# Allegro board ESP8266_SWITCH.brd
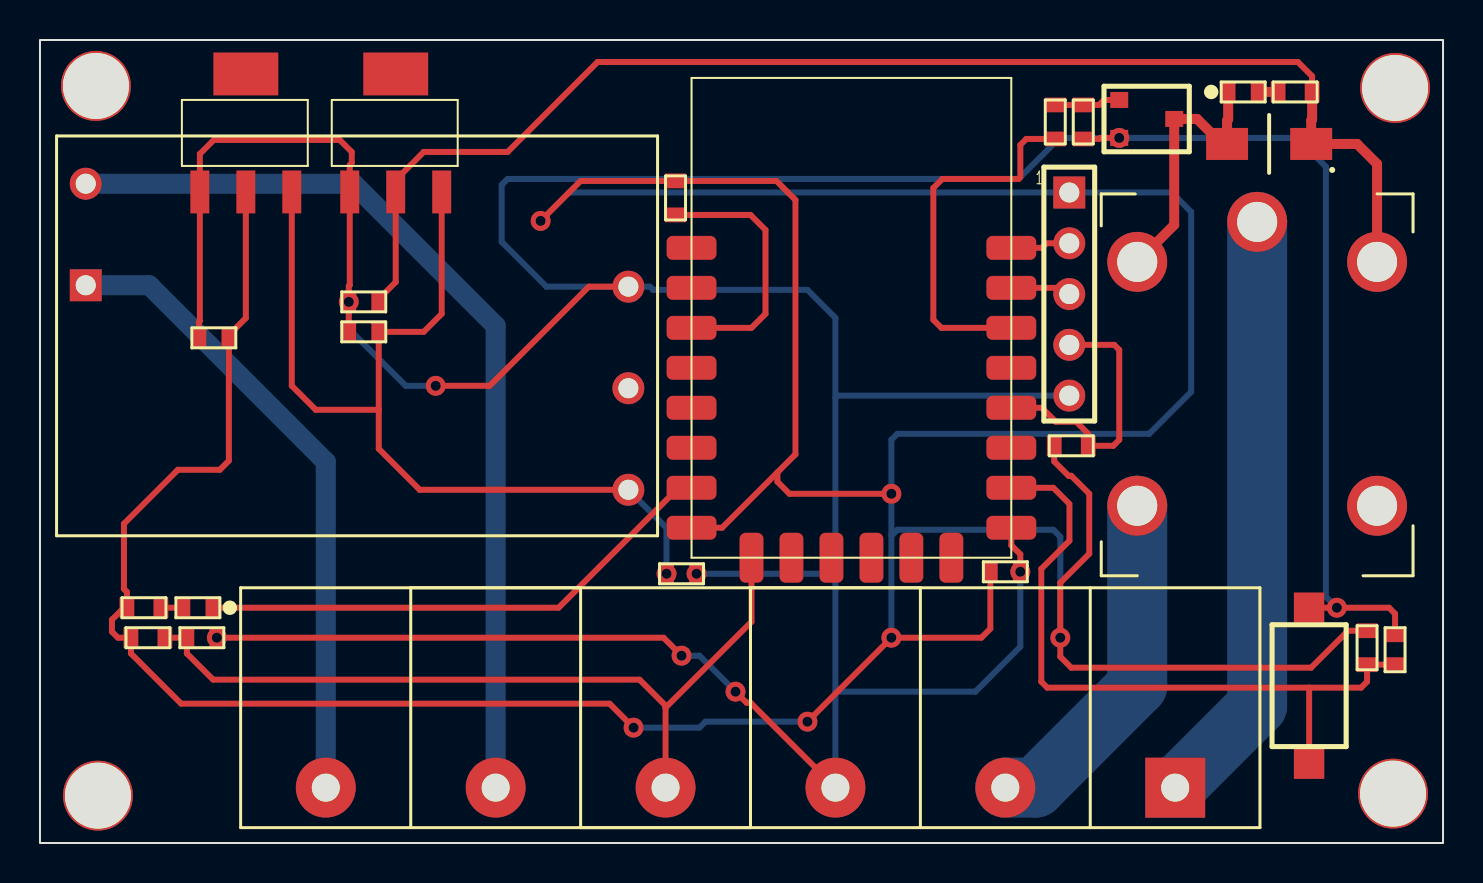
[diagram p0: board, top side]
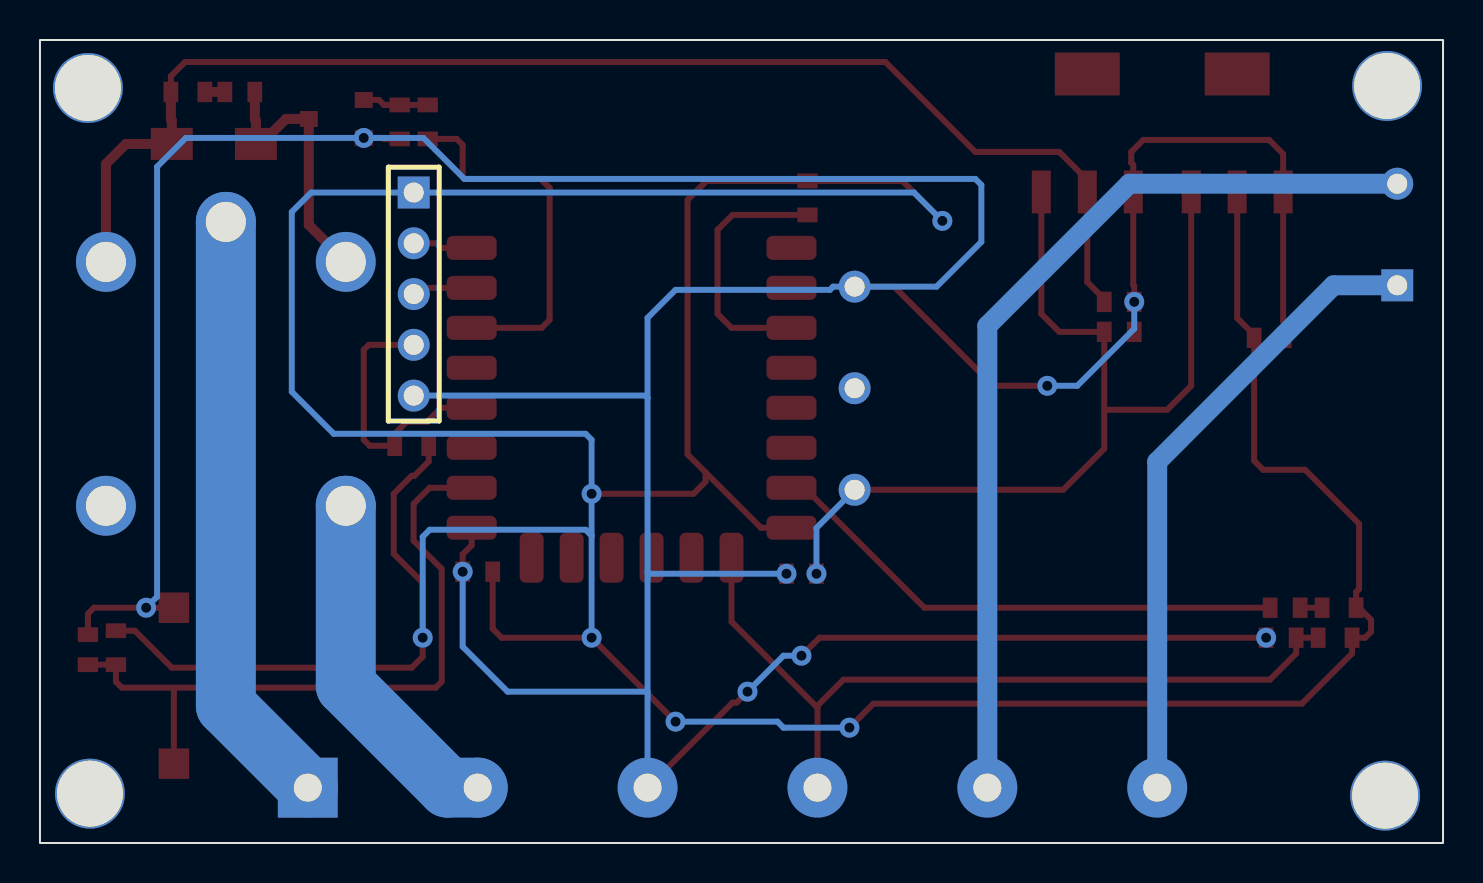
[diagram p1: board, bottom side, seen from below]

Outline 70.2 x 40.17 mm; copper layers: TOP, BOTTOM. Coordinates in mm from the lower left corner of the outline.
Outline path: rectangle 0,0 70.2,40.17

## Design rules (mm)
constraint set DEFAULT: min track width 0.3

## Placement (name value [footprint] x y rotation side)
C1  104  [CAP_SMD_0603]  16.2 25.57 180 top
C2  104  [CAP_SMD_0603]  32.1 13.47 0 top
C3  104  [CAP_SMD_0603]  8.7 25.27 180 top
C4  104  [CAP_SMD_0603]  16.2 27.07 180 top
C5  104  [CAP_SMD_0603]  67.8 9.67 90 top
C6  104  [CAP_SMD_0603]  48.3 13.57 180 top
C7  104  [CAP_SMD_0603]  8.1 10.27 0 top
D1  PWM LED  [LED_SMD_0603]  7.9 11.77 180 top
D2  1N4007  [1N4007_SMD]  61.5 34.97 180 top
D3  PWM LED  [LED_SMD_0603]  60.2 37.57 0 top
J3  CON5  [J1_5_254]  51.5 31.27 270 top
J4  CON6  [KF850_6P]  56.8 2.77 180 top
LS1  RELAY SPDT  [SONGLE_RELAY_5PINS]  60.9 22.97 0 top
M1  12V  [AC2DC_CONVERTER]  30.9 15.37 180 top
NOREF  -  [unnamed]  2.9 2.37 0 top
NOREF#2  -  [unnamed]  67.8 37.77 0 top
NOREF#3  -  [unnamed]  2.8 37.87 0 top
NOREF#4  -  [unnamed]  67.7 2.47 0 top
Q1  MMBT2222A  [SOT23]  54 37.17 90 top
R1  330R  [RES_SMD_0603]  5.2 11.77 0 top
R2  1K  [RES_SMD_0603]  62.8 37.57 180 top
R3  1K  [RES_SMD_0603]  50.8 36.07 270 top
R4  100k  [RES_SMD_0603]  52.2 36.07 270 top
R5  10K  [RES_SMD_0603]  66.4 9.77 90 top
R6  10K  [RES_SMD_0603]  31.8 32.27 270 top
R7  10K  [RES_SMD_0603]  51.6 19.87 180 top
R8  10K  [RES_SMD_0603]  5.4 10.27 180 top
SW1  SW_PB_SPST  [SMD_2PIN_BUTTON]  63.5 7.87 90 top
U1  AMS1117  [SOT223]  10.2 35.47 0 top
U2  AMS1117  [SOT223]  17.7 35.47 0 top
U3  ESP8266-12E  [ESP8266_SMD]  32.6 14.27 0 top

## Library data of the parts
C1-C7 = CAPACITOR NON-POL
D1 D3 = LED
D2 = DIODE_0
J3 = CON5
J4 = CON6
LS1 = RELAY SPDT
M1 = AC2DC_Module
Q1 = NPN BEC_1
R1-R8 = R
SW1 = SW_PB_SPST
U1 U2 = ASM1117
U3 = ESP8266-12E

## Footprints (pads in the part's own frame, mm; a bottom-side part is the same pattern mirrored in y, then rotated)
1N4007_SMD
  rect 2.1x1.6 smd: A(2.104,0) C(-2.104,0)
AC2DC_CONVERTER
  rect 1.6x1.6 hole 1: 1(28.61,-12.53)
  round 1.6 hole 1: 2(28.61,-17.61) 3(1.46,-2.3) 4(1.46,-7.38) 5(1.46,-12.46)
CAP_SMD_0603
  rect 0.74x1.02 smd: 1(-0.75,0) 2(0.75,0)
ESP8266_SMD
  rrect 2.5x1.2 smd: 1(0,15.5) 2(0,13.5) 3(0,11.5) 4(0,9.5) 5(0,7.5) 6(0,5.5) 7(0,3.5) 8(0,1.5) 15(16,1.5) 16(16,3.5) 17(16,5.5) 18(16,7.5) 19(16,9.5) 20(16,11.5) 21(16,13.5) 22(16,15.5)
  rrect 1.2x2.5 smd: 9(3,0) 10(5,0) 11(7,0) 12(9,0) 13(11,0) 14(13,0)
J1_5_254
  rect 1.6x1.6 hole 1: 1(-1.27,0)
  round 1.6 hole 1: 2(1.27,0) 3(3.81,0) 4(6.35,0) 5(8.89,0)
KF850_6P
  rect 3x3 hole 1.4: 1(0,0)
  round 3 hole 1.4: 2(8.5,0) 3(17,0) 4(25.5,0) 5(34,0) 6(42.5,0)
LED_SMD_0603
  rect 0.74x1.02 smd: 1(-0.75,0) 2(0.75,0)
RES_SMD_0603
  rect 0.74x1.02 smd: 1(-0.85,0) 2(0.85,0)
SMD_2PIN_BUTTON
  rect 1.524x1.524 smd: 1(-3.9,0) 2(3.9,0)
SONGLE_RELAY_5PINS
  round 3 hole 2: 1(-6,6.1) 2(6,6.1) 3(0,8.1) 4(-6,-6.1) 5(6,-6.1)
SOT23
  rect 0.8x0.9 smd: 1(0,0) 2(-1.9,0) 3(-0.95,-2.75)
SOT223
  rect 3.25x2.15 smd: (0.1,3)
  rect 0.95x2.15 smd: 1(-2.201,-2.901) 2(0.099,-2.901) 3(2.399,-2.901)
unnamed
  round 3.5 hole 3.3: (0,0)

## Nets
3V3: C3.1 C6.2 J3.1 R1.1 R5.2 R6.1 R7.2 R8.2 U1.2(VOUT) U3.8(VCC)
5V: C4.1 D2.C(K) LS1.2 R2.1 U2.2(VOUT)
12V: C1.1 C2.1 M1.3 U1.3 U2.3
GND: C1.2 C2.2 C3.2 C4.2 C5.2 C6.1 C7.2 J3.5 J4.3 M1.5 Q1.2(E) R4.2 SW1.2 U1.1 U2.1 U3.15
A2: D2.A D3.1(CATHODE) LS1.1 Q1.3
AC1: J4.6 M1.1
AC2: J4.5 M1.2(AC2)
BUTTON: C5.1 R5.1 SW1.1 U3.16
CT: C7.1 J4.4 R8.1 U3.9
FLASH: J3.4 R7.1 U3.18
PWM: R3.2 U3.20
RL1: J4.2 LS1.4(NO)
RL2: J4.1 LS1.3
RX: J3.3 U3.21
STATUS: D1.1(CATHODE) U3.7
TX: J3.2 U3.22
N348867: Q1.1 R3.1 R4.1
N351637: R6.2 U3.3
N3492541: D3.2 R2.2
N3493341: D1.2 R1.2

Pads without a net: LS1 5; M1 4; U3 1 2 4 5 6 10 11 12 13 14 17 19

## Via types
v1: diameter 1, hole 0.5, TOP to BOTTOM, 16 vias

## Routing (per net, layer and track width the routed paths; a pad name or vN(x,y) marks a point on that pad's centre or on a via; arc(x,y) is an arc through that point)
3V3: length 227.9
  TOP w0.3: 36.9,18.54 34.13,15.77 U3.8 ; 36.9,18.54 36.9,18.07 37.5,17.47 v1(42.6,17.47) ; 36.9,18.54 37.8,19.44 37.8,32.17 36.85,33.12 R6.1 27.05,33.12 v1(25.05,31.12) ; R7.2 50.75,19.08 51.46,18.37 51.6,18.37 52.5,17.47 52.5,14.47 51.05,13.02 v1(51.05,10.27) 51.05,9.32 51.6,8.77 63.6,8.77 65.45,10.62 R5.2 ; U1.2 10.3,26.26 9.45,25.41 C3.1 9.45,19.12 9,18.67 6.9,18.67 4.2,15.97 4.2,12.71 4.35,12.56 R1.1 4.2,11.77 3.6,11.17 3.6,10.57 3.9,10.27 R8.2 4.55,9.48 7.06,6.97 28.5,6.97 v1(29.7,5.77) ; v1(38.4,6.07) v1(42.6,10.27) 47.1,10.27 47.55,10.72 C6.2
  BOTTOM w0.3: 42.6,15.37 v1(42.6,10.27) ; 42.6,15.37 v1(42.6,17.47) 42.6,20.17 42.9,20.47 55.5,20.47 57.6,22.57 57.6,31.57 56.63,32.54 J3.1 26.47,32.54 v1(25.05,31.12) ; 42.6,15.37 42.9,15.67 50.7,15.67 51.05,15.32 v1(51.05,10.27) ; v1(29.7,5.77) 33,5.77 33.3,6.07 v1(38.4,6.07)
5V: length 67.1
  TOP w0.3: C4.1 16.95,27.21 17.8,28.06 U2.2 17.8,33.17 19.2,34.57 23.4,34.57 27.9,39.07 62.94,39.07 63.65,38.36 R2.1
  TOP w0.5: LS1.2 66.9,33.97 65.9,34.97 D2.C 63.6,36.15 63.65,36.19 R2.1
12V: length 48.3
  TOP w0.3: U2.3 20.1,26.47 19.2,25.57 C1.1 16.95,21.67 ; 16.95,21.67 13.8,21.67 12.6,22.87 U1.3 ; 16.95,21.67 16.95,19.72 19,17.67 M1.3
  BOTTOM w0.3: v1(31.35,13.47) 31.35,15.76 M1.3
GND: length 231.1
  TOP w0.3: v1(34.8,7.57) 35.35,7.02 35.55,7.02 J4.3 ; C1.2 v1(15.45,27.07) 15.45,27.86 15.5,27.91 U2.1 15.5,33.92 15.6,34.02 15.6,34.57 15,35.17 8.7,35.17 8,34.47 U1.1 8,26.11 7.95,26.06 C3.2 ; U3.15 48.6,14.89 49.05,14.44 v1(49.05,13.57) ; v1(54,35.27) 53.04,35.27 52.99,35.22 R4.2 ; C5.2 67.8,11.47 67.5,11.77 v1(64.89,11.77) SW1.2 ; v1(8.85,10.27) 31.2,10.27 v1(32.1,9.37) ; v1(19.8,22.87) 22.5,22.87 27.46,27.83 M1.5
  BOTTOM w0.3: v1(32.1,9.37) 33,9.37 v1(34.8,7.57) ; J3.5 39.91,22.38 39.8,22.27 ; v1(64.89,11.77) 64.34,12.32 64.34,33.83 62.9,35.27 v1(54,35.27) 51.01,35.27 48.96,33.22 23.4,33.22 23.1,32.92 23.1,30.07 25.34,27.83 M1.5 30.52,27.83 30.68,27.67 38.4,27.67 39.8,26.27 39.8,22.27 ; 39.8,22.27 39.8,13.57 ; v1(49.05,13.57) 49.05,9.82 46.8,7.57 39.8,7.57 ; 39.8,13.57 39.7,13.47 v1(32.85,13.47) ; 39.8,13.57 39.8,7.57 ; 39.8,7.57 J4.3 ; v1(15.45,27.07) 15.45,25.72 18.3,22.87 v1(19.8,22.87)
A2: length 13.7
  TOP w0.5: D3.1 59.45,36.2 59.4,36.15 D2.A 59.15,34.97 57.9,36.22 Q1.3 56.75,30.92 LS1.1
AC1: length 32
  BOTTOM w1: J4.6 14.3,19.07 5.47,27.9 M1.1
AC2: length 46.6
  BOTTOM w1: J4.5 22.8,25.87 15.69,32.98 M1.2
BUTTON: length 35.3
  TOP w0.3: 63.5,7.77 50.4,7.77 50.1,8.07 50.1,13.71 51.51,15.12 51.51,16.96 50.7,17.77 U3.16 ; 63.5,7.77 SW1.1 ; 63.5,7.77 66.1,7.77 66.4,8.07 R5.1 C5.1
CT: length 40.3
  TOP w0.3: U3.9 35.6,11.07 31.3,6.77 ; R8.1 C7.1 7.35,9.48 8.66,8.17 30,8.17 31.3,6.87 31.3,6.77 ; 31.3,6.77 J4.4
FLASH: length 13.8
  TOP w0.3: U3.18 50.13,21.77 50.83,21.07 51.85,21.07 52.45,20.47 R7.1 53.7,19.87 54,20.17 54,24.67 53.75,24.92 J3.4
PWM: length 18.7
  TOP w0.3: R3.2 49.35,35.22 49.05,34.92 49.05,33.31 48.96,33.22 45.15,33.22 44.7,32.77 44.7,26.17 45.1,25.77 U3.20
RL1: length 17.7
  BOTTOM w3: J4.2 49.8,2.77 54.9,7.87 LS1.4
RL2: length 30
  BOTTOM w3: J4.1 60.9,6.87 LS1.3
RX: length 3
  TOP w0.3: U3.21 51.19,27.77 J3.3
STATUS: length 26.4
  TOP w0.3: U3.7 31.95,17.77 25.95,11.77 D1.1
TX: length 3
  TOP w0.3: U3.22 50.13,29.77 50.36,30 J3.2
N348867: length 3.3
  TOP w0.3: Q1.1 53.24,37.17 52.99,36.92 R4.1 R3.1
N351637: length 13
  TOP w0.3: U3.3 35.6,25.77 36.3,26.47 36.3,30.67 35.55,31.42 R6.2
N3492541: length 1
  TOP w0.5: D3.2 R2.2
N3493341: length 1.1
  TOP w0.3: R1.2 D1.2
